# Altium PCB power_sup.PcbDoc
Units mm, origin at the board's own origin, x right, y up, seen from the top; angles counter-clockwise.
Board outline 64.01 x 77.72 mm, 2 copper layers (Top Layer, Bottom Layer); 26 components, 162 nets, 69 pads, 0 vias.
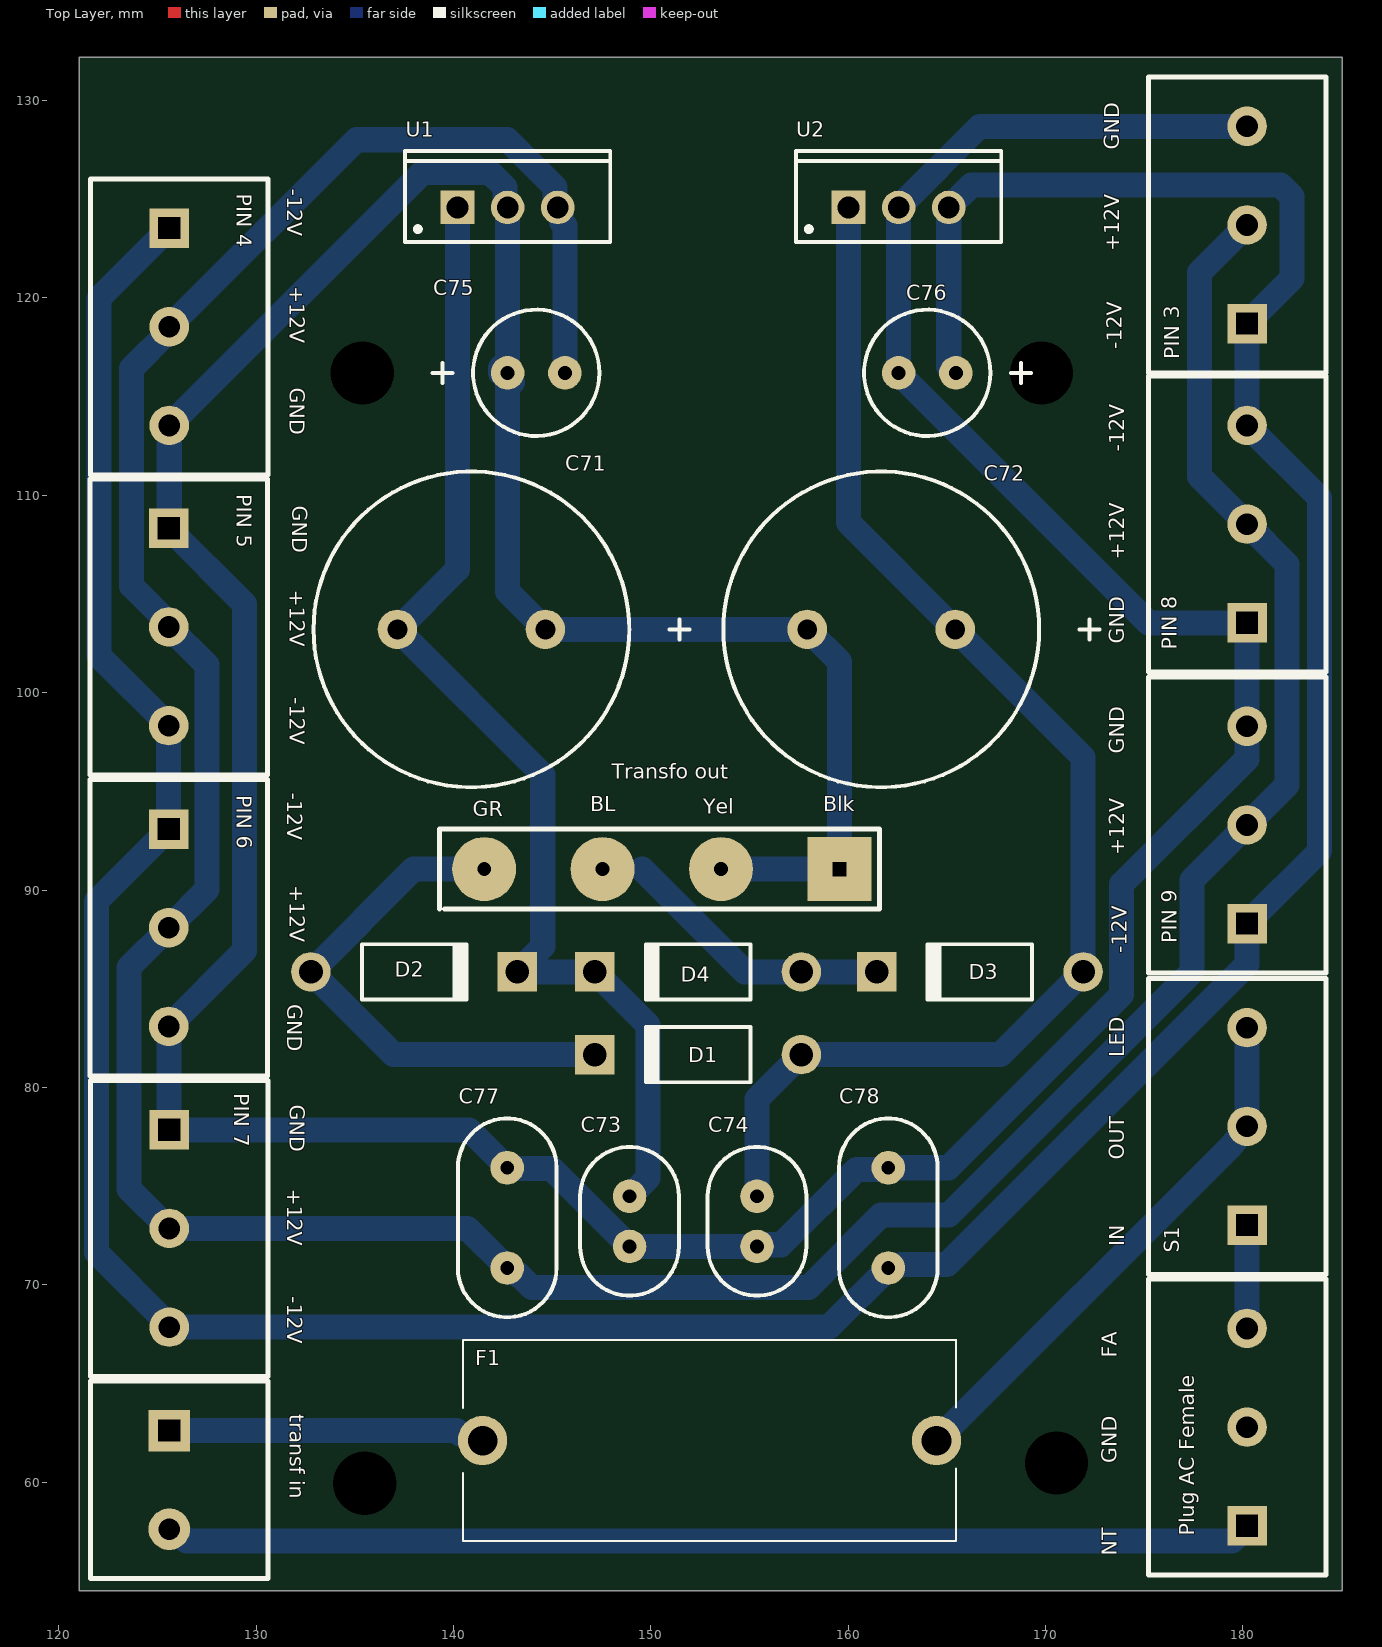
[diagram p0: Top Layer view]
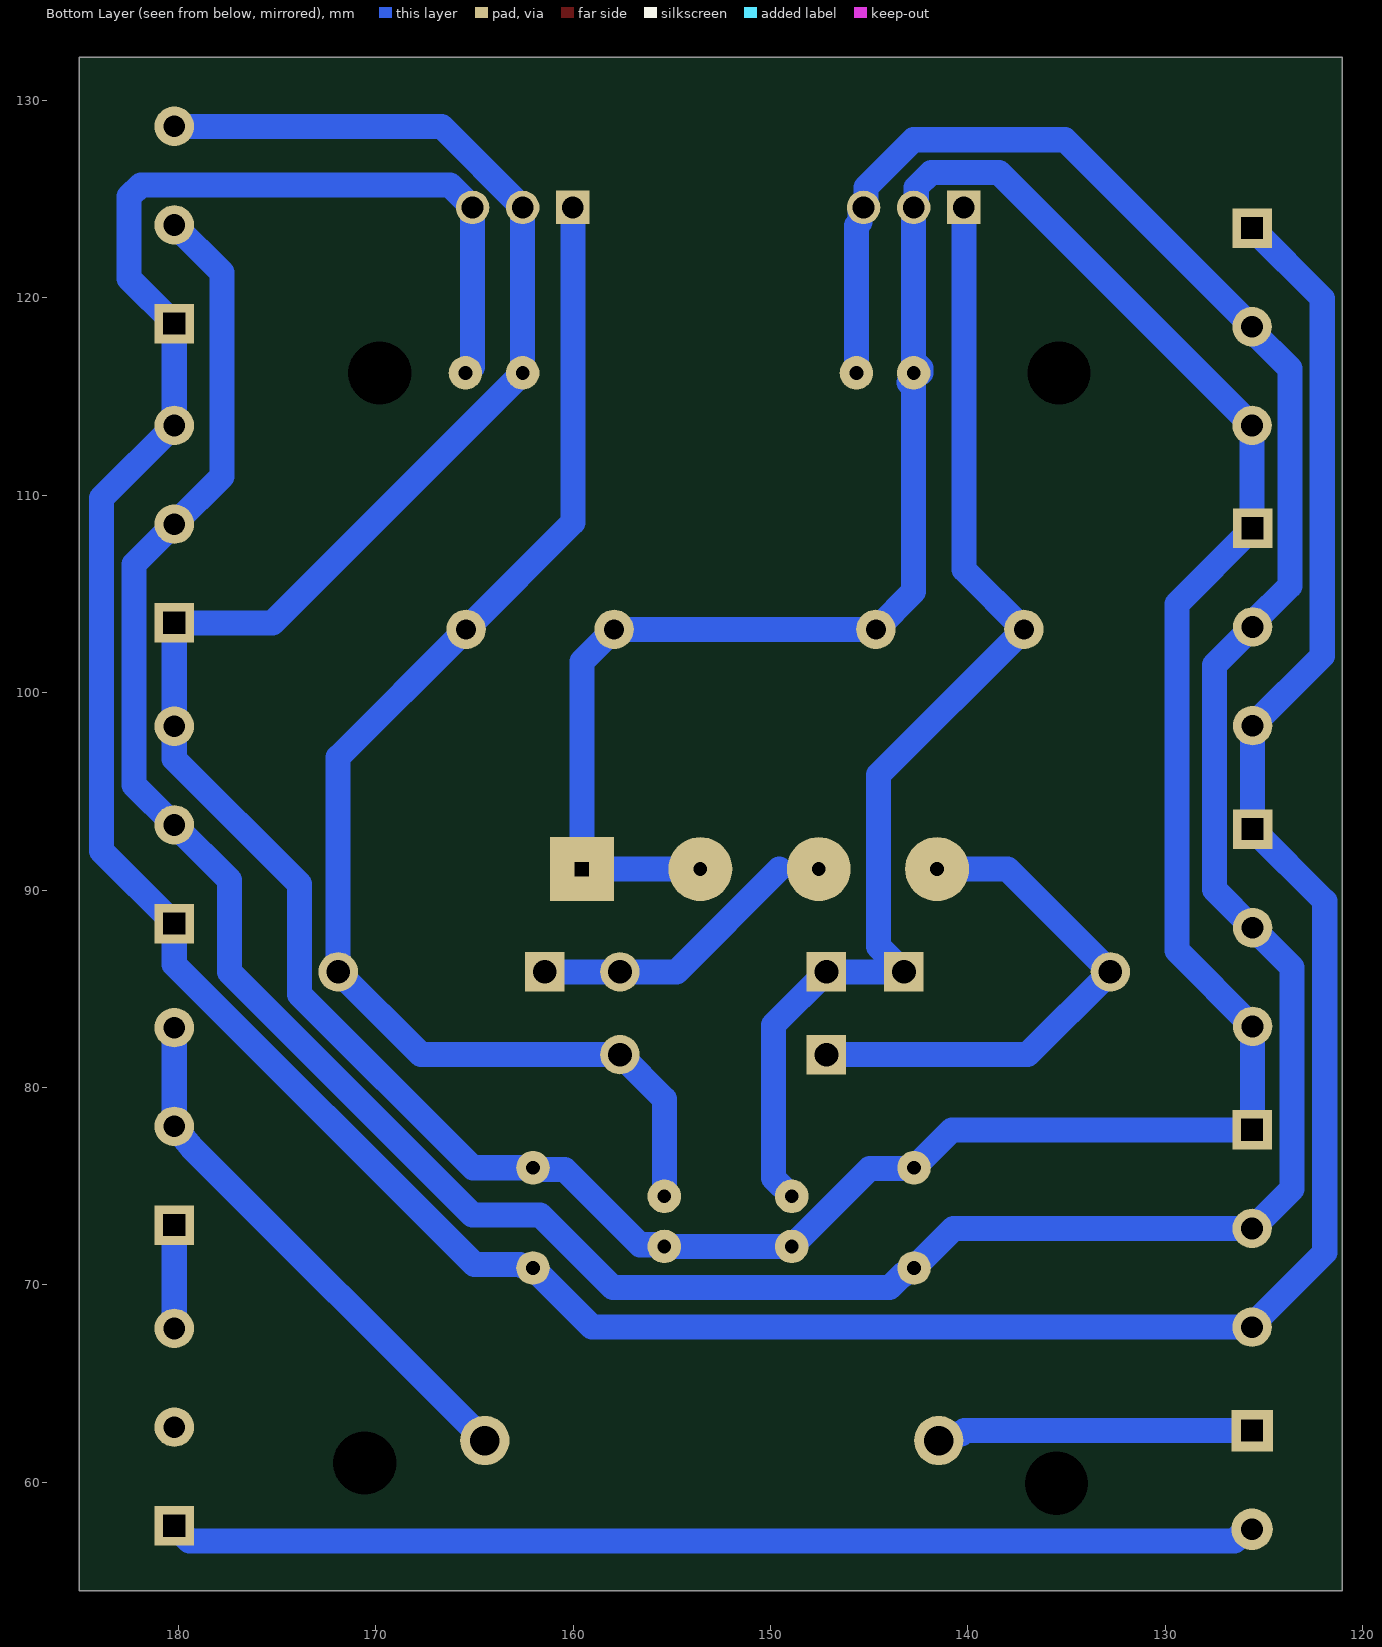
[diagram p1: Bottom Layer view, seen from below]

## Layer stack, top to bottom
Top Solder: solder mask 0.0102, Solder Resist, Dk 3.5
Top Layer: signal copper 0.0356
Dielectric 1: dielectric 0.32, FR-4, Dk 4.8
Bottom Layer: signal copper 0.0356
Bottom Solder: solder mask 0.0102, Solder Resist, Dk 3.5

## Board outline
121.031,132.207 121.031,54.483 185.039,54.483 185.039,132.207

## Design rules (kind name [scope] priority, off if disabled: settings)
Clearance [All] p1: gap=0.254 ignorepadtopadclearanceinfootprint=FALSE except(0: Arc-Hole Track-Hole SMDPad-Hole THPad-Hole Via-Hole Fill-Hole Poly-Hole Region-Hole Text-Hole)
HoleSize [All] p1: absolutevalues=TRUE maxlimit=5.08 minlimit=0.025 maxpercent=80.000 minpercent=20.000
PolygonConnect [All] p1: connectstyle=Relief reliefconductorwidth=0.254 reliefentries=4 polygonreliefangle="90 Angle" airgapwidth=0.254
RoutingLayers [All] p1: top layer_v5=FALSE bottom layer_v5=TRUE
RoutingVias [All] p1: holewidth=0.711 width=1.27 viastyle="Through Hole" minholewidth=0.711 minwidth=1.27 maxholewidth=0.711 maxwidth=1.27
SolderMaskExpansion [All] p1: expansion=0.102 istentingtop=FALSE
Width [All] p1: maxlimit=1.27 minlimit=0.254 preferedwidth=0.762 minimp=50.000000 maximp=50.000000 favimp=50.000000
28 further rules are at their usual default settings.

## Classes and differential pairs
component class power_SUP: C71 C72 C73 C75 C76 C77 C78 D1 D2 D3 D4 F1 S1

## Components (designator, comment, footprint, x,y, rotation, side; value= is the part's Value field where it differs from the comment)
C71 "Cap Pol2" "CAPACITOR 2200UF" 137.162,103.204 r0 top value=2200uF
C72 "Cap Pol2" "CAPACITOR 2200UF" 157.93,103.204 r0 top value=2200uF
C73 "Cap" 220PpF 148.925,71.942 r90 top value=220pF
C74 "Cap" 220PpF 155.384,74.482 r270 top value=220pF
C75 "Cap Pol2" "CAPACITOR 100UF" 145.648,116.205 r180 top value=100uF
C76 "Cap Pol2" "CAPACITOR 100UF" 162.56,116.205 r0 top value=100uF
C77 "Cap" "CAPACITOR 100PF" 142.726,75.928 r270 top value=100pF
C78 "Cap" "CAPACITOR 100PF" 162.037,70.848 r90 top value=100pF
D1 "Diode 1N4007" DO-41 152.4,81.66 r180 top
D2 "Diode 1N4007" DO-41 138.01,85.852 r0 top
D3 "Diode 1N4007" DO-41 166.676,85.852 r180 top
D4 "Diode 1N4007" DO-41 152.4,85.852 r180 top
F1 "Fuse_case" FLUSE_HOLDER 164.478,62.103 r180 top
"PIN 3" "Header 3" HEADER_3 180.213,118.698 r90 top
"PIN 4" "Header 3" HEADER_3 125.603,123.538 r270 top
"PIN 5" "Header 3" HEADER_3 125.575,108.328 r270 top
"PIN 6" "Header 3" HEADER_3 125.575,93.088 r270 top
"PIN 7" "Header 3" HEADER_3 125.603,77.851 r270 top
"PIN 8" "Header 3" HEADER_3 180.213,103.538 r90 top
"PIN 9" "Header 3" HEADER_3 180.213,88.298 r90 top
S1 "switch" HEADER_3 180.213,73.025 r90 top
"transf in" "trans_in" HEADER_2 125.603,62.611 r270 top (schematic designator PIN1)
"Transfo out" "trans_out" TRANSFO 159.559,91.059 r180 top (schematic designator PIN2)
U1 "L7812ACV" VOLT_REG 142.748,124.587 r0 top
U2 "L7912ACV" VOLT_REG 162.56,124.587 r0 top
? "Plug AC Female" HEADER_3 180.213,57.785 r90 top

## Footprints (in the part's own frame and the unit in brackets; to place one, negate y for a bottom-side part, rotate by r counter-clockwise, add the part's x,y. Pads: shape width x height; smd on the part's side, far side on the other; paste and mask are expansions set on the pad)
220PpF [mm]
  round 1.7 hole 0.7: 1(0,0) 2(2.54,0)
  silkscreen extent -2.5,-2.5 5.04,2.5
"CAPACITOR 100PF" [mm]
  round 1.7 hole 0.7: 1(0,0) 2(5.08,0)
  silkscreen extent -2.5,-2.5 7.58,2.5
"CAPACITOR 100UF" [mm]
  round 1.7 hole 0.7: 1(0,0) 2(2.9,0)
  silkscreen extent -1.75,-3.2 6.71,3.2
"CAPACITOR 2200UF" [mm]
  round 2 hole 1: 1(0,0) 2(7.5,0)
  silkscreen extent -4.25,-8 14.8,8
DO-41 [mm] "Diode, Axial; Body 5.2 x 2.7 mm (LxDia. max), Lead Dia. 0.86 mm (max)"
  round 2 hole 1.2: 1(-5.23,0)
  rect 2x2 hole 1.2: 2(5.23,0)
  silkscreen extent -2.65,-1.4 2.75,1.4
FLUSE_HOLDER [mm]
  round 2.5 hole 1.5: 1(0,0) 2(23,0)
  silkscreen extent -1,-5.1 24,5.1, body extent -1.27,-4.43 24.13,4.17, height 2.1
HEADER_2 [mm]
  rect 2.1x2.1 hole 1.1 square: 1(0,0)
  round 2.1 hole 1.1: 2(5,0)
  silkscreen extent -2.5,-4 7.5,5, body extent -2.65,-4 7.5,4, height 10
HEADER_3 [mm]
  rect 2x2 hole 1.1 square: 1(0,0)
  round 2 hole 1.1: 2(5,0) 3(10,0)
  silkscreen extent -2.5,-4 12.5,5, body extent -2.65,-4 12.5,4, height 10
TRANSFO [mm]
  rect 3.24x3.24 hole 0.7 square: 1(0,0)
  round 3.24 hole 0.7: 2(6,0) 3(12,0) 4(18,0)
  silkscreen extent -2.03,-2.03 20.25,2.03
VOLT_REG [mm] "TO, Thru-Hole, Vertical, Heatsink Mounted; 3 In-Line Leads; Pitch 2.54 mm"
  rect 1.7x1.7 hole 1.1: 1(-2.54,0)
  round 1.7 hole 1.1: 2(0,0) 3(2.54,0)
  silkscreen extent -5.2,-1.75 5.2,2.85, body extent -5.25,-1.8 5.25,2.9, height 19.7

## Part data
C71 C72: "electrolytic", LatestRevisionDate=17-Jul-2002, LatestRevisionNote="Re-released for DXP Platform.", PackageDescription="Polarized Capacitor; 2 Leads", PackageReference=POLAR0.8, Published=8-Jun-2000, Publisher="Altium Limited"
C73 C74 C77 C78: library part Cap_3, "Capacitor", LatestRevisionDate=17-Jul-2002, LatestRevisionNote="Re-released for DXP Platform.", PackageDescription="Radial Cap, Thru-Hole; 2 Leads; 0.3 in Pin Spacing", PackageReference=RAD-0.3, Published=8-Jun-2000, Publisher="Altium Limited"
C75 C76: library part "Cap Pol2_2", "Polarized Capacitor (Axial)", LatestRevisionDate=17-Jul-2002, LatestRevisionNote="Re-released for DXP Platform.", PackageDescription="Polarized Capacitor; 2 Leads", PackageReference=POLAR0.8, Published=8-Jun-2000, Publisher="Altium Limited"
D1 D2 D3 D4: "1 Amp General Purpose Rectifier", Code_JEDEC=DO-204-AL, ComponentLink1Description="Manufacturer Link", ComponentLink1URL=http://www.fairchildsemi.com/, ComponentLink2Description=Datasheet, ComponentLink2URL=http://www.fairchildsemi.com/ds/1N%2F1N4001.pdf, DatasheetVersion=1998, LatestRevisionDate=17-Jul-2002, LatestRevisionNote="Re-released for DXP Platform.", PackageDescription="Diode, Axial; Body 5.2 x 2.7 mm (LxDia. max), Lead Dia. 0.86 mm (max)", PackageReference=DO-41, PackageVersion=Aug-1999, Published=8-Jun-2000, Publisher="Altium Limited"
"PIN 3" "PIN 4" "PIN 5" "PIN 6" "PIN 7" "PIN 8" "PIN 9": "Header, 3-Pin", LatestRevisionDate=17-Jul-2002, LatestRevisionNote="Re-released for DXP Platform.", Publisher="Altium Limited"
"transf in": library part MHDR1X2, "Header, 2-Pin", LatestRevisionDate=17-Jul-2002, LatestRevisionNote="Re-released for DXP Platform.", Publisher="Altium Limited"
"Transfo out": library part MHDR1X4, "Header, 4-Pin", LatestRevisionDate=17-Jul-2002, LatestRevisionNote="Re-released for DXP Platform.", Publisher="Altium Limited"
U1: library part 7812, "Positive Voltage Regulator, 12V, 3-Pin TO-220", ComponentLink1Description="Manufacturer URL", ComponentLink1URL=http://www.st.com, ComponentLink2Description=Datasheet, ComponentLink2URL=http://www.st.com/internet/com/TECHNICAL_RESOURCES/TECHNICAL_LITERATURE/DATASHEET/CD00000444.pdf, ComponentLink3Description="Package Specification", ComponentLink3URL=http://www.st.com/internet/com/TECHNICAL_RESOURCES/TECHNICAL_LITERATURE/PACKAGE_INFORMATION/CD00004649.pdf, DatasheetVersion=16/11/2011, PackageDescription="TO, Thru-Hole, Vertical, Heatsink Mounted; 3 In-Line Leads; Pitch 2.54 mm", PackageReference=TO220, PackageVersion=ver3.0
U2: library part 7912, "2% Negative Voltage Regulator, -12V, 3-Pin TO-220", ComponentLink1Description="Manufacturer URL", ComponentLink1URL=http://www.st.com, ComponentLink2Description=Datasheet, ComponentLink2URL=http://www.st.com/internet/com/TECHNICAL_RESOURCES/TECHNICAL_LITERATURE/DATASHEET/CD00000451.pdf, ComponentLink3Description="Package Specification", ComponentLink3URL=http://www.st.com/internet/com/TECHNICAL_RESOURCES/TECHNICAL_LITERATURE/PACKAGE_INFORMATION/CD00004649.pdf, DatasheetVersion=1/11/2010, PackageDescription="TO, Thru-Hole, Vertical, Heatsink Mounted; 3 In-Line Leads; Pitch 2.54 mm", PackageReference=TO220, PackageVersion=ver3.0
?: "IEC Mains Power Outlet, EN60 320-2-2 F Class I, PC Flange Rear Mount, Chassis Socket", MaximumRating="10A, 250V a.c. (UL & CSA 15A, 250V a.c.)", PackageDocument="ver.80, 15-Sep-2003", ComponentLink1Description="Manufacturer Link", ComponentLink1URL=http://www.bulgin.co.uk/, DatasheetDocument="ver.80, 15-Sep-2003", DrillSize="Corresponds to nominal value.", LatestRevisionDate=15-Jul-2004, LatestRevisionNote="Component Replaced & renamed from \"Phonejack\".", MountingFixtures="Not drawn on schematic symbol.", PackageReference=PX0675/PC, PCB_Layout="Complies with manufacturer's recommendation.", Published=15-Jul-2004, Publisher="Altium Limited", Terminations="P.C. Spills"

## Free pads (board coordinates)
  round 1.524 hole 3.2 unplated: 2(135.382,116.205) 3(169.799,116.205) 5(135.509,59.944) 5(170.561,60.96)

## Nets (pads, with @x,y where several pads share a name; then routed paths per layer and width w, separated by ;. In a path a pad name is that pad's centre, name@x,y a point inside that pad or via, vN(x,y) a via of type N, cw(c..) or ccw(c..) an arc to the next point about the centre after c; other vN are vias at no path point)
GND: "PIN 3.3" "PIN 4.3" "PIN 5.1" "PIN 6.3" "PIN 7.1" "PIN 8.1" "PIN 9.3" "Transfo out.1" "Transfo out.2" C71.2 C72.1 C73.1 C74.2 C75.2 C76.1 C77.1 C78.2 U1.2 U2.2 | length 244.3
  Bottom Layer w1.27: C75.2@142.388,116.205 142.388,116.459 142.748,116.819 U1.2 142.617,124.718 142.617,125.607 141.859,126.365 138.43,126.365 125.603,113.538 125.603,108.357 125.575,108.328 129.413,104.49 129.413,86.927 125.575,83.088 125.589,83.074 125.589,77.865 125.603,77.851 140.803,77.851 C77.1 142.76,75.894 144.973,75.894 C73.1 C74.2 155.466,72.024 156.606,72.024 160.427,75.845 161.955,75.845 C78.2 165.082,75.928 173.863,84.709 173.863,90.297 180.213,96.647 180.213,98.298 180.213,103.538 175.227,103.538 C76.1 U2.2@162.56,124.529 ; C75.2@142.494,116.205 C75.2@142.748,115.951 ; C75.2@142.748,115.484 142.748,105.118 C71.2 C72.1 159.559,101.575 159.559,91.059 154.559,91.059 ; C75.2 C75.2@142.748,115.951 ; C75.2@142.982,115.718 C75.2@142.748,115.951 ; U2.2 166.671,128.698 180.213,128.698
GND_Chasie: ?.2
Net_1: "transf in.2" ?.1 | length 55.2
  Bottom Layer w1.27: 125.603,57.611 125.896,57.611 126.484,57.023 179.451,57.023 ?.1
Net_3: ?.3 S1.1 | length 5.2
  Bottom Layer w1.27: ?.3 S1.1
NetC1_1: 
NetC1_2: 
NetC2_1: 
NetC2_2: 
NetC3_1: 
NetC4_1: 
NetC4_2: 
NetC5_1: 
NetC21_2: 
NetC22_1: 
NetC22_2: 
NetC23_1: 
NetC23_2: 
NetC24_1: 
NetC24_2: 
NetC25_1: 
NetC26_1: 
NetC27_1: 
NetC27_2: 
NetC28_1: 
NetC31_1: 
NetC31_2: 
NetC34_1: 
NetC34_2: 
NetC35_1: 
NetC35_2: 
NetC36_2: 
NetC40_1: 
NetC40_2: 
NetC43_1: 
NetC43_2: 
NetC44_1: 
NetC44_2: 
NetC45_2: 
NetC51_1: 
NetC51_2: 
NetC52_2: 
NetC53_1: 
NetC53_2: 
NetC54_1: 
NetC54_2: 
NetC55_1: 
NetC55_2: 
NetC56_1: 
NetC57_1: 
NetC58_1: 
NetC58_2: 
NetC59_1: 
NetC60_1: 
NetC60_2: 
NetC61_2: 
NetC62_1: 
NetC62_2: 
NetC63_1: 
NetC63_2: 
NetC64_1: 
NetC64_2: 
NetC65_1: 
NetC66_1: 
NetC67_1: 
NetC67_2: 
NetC68_1: 
NetC71_1: C71.1 C73.2 D2.2 D4.2 U1.1 | length 60.4
  Bottom Layer w1.27: U1.1 140.208,106.251 C71.1 144.526,95.84 144.526,87.138 D2.2 D4.2 149.86,83.162 149.86,75.417 C73.2
NetC72_2: C72.2 C74.1 D1.1 D3.1 U2.1 | length 67.8
  Bottom Layer w1.27: C74.1 155.384,79.414 D1.1 167.714,81.66 D3.1 171.906,96.728 C72.2 160.02,108.614 U2.1
NetC81_1: 
NetC81_2: 
NetC83_1: 
NetC83_2: 
NetD1_2: "Transfo out.4" D1.2 D2.1 | length 27.1
  Bottom Layer w1.27: 141.559,91.059 137.987,91.059 D2.1 136.972,81.66 D1.2
NetD3_2: "Transfo out.3" D3.2 D4.1 | length 14
  Bottom Layer w1.27: 149.559,91.059 154.766,85.852 D4.1 D3.2
NetD5_1: 
NetD7_2: 
NetD8_2: 
NetD9_2: 
NetD10_2: 
NetD11_1: 
NetD12_2: 
NetD14_2: 
NetD15_2: 
NetD16_2: 
NetD17_2: 
NetF1_1: F1.1 S1.2 S1.3 | length 27.4
  Bottom Layer w1.27: F1.1 179.337,76.962 180.213,78.025 S1.3
NetF1_2: "transf in.1" F1.2 | length 16.1
  Bottom Layer w1.27: 125.603,62.611 140.163,62.611 140.338,62.436 141.145,62.436 F1.2
NetIC1_1: 
NetIC1_2: 
NetIC1_6: 
NetIC1_7: 
NetIC2_2: 
NetIC2_3: 
NetIC2_6: 
NetIC3_6: 
NetIC4_1: 
NetIC4_2: 
NetIC4_6: 
NetIC4_7: 
NetIC5_5: 
NetIC6_6: 
NetIC7_6: 
NetIC8_1: 
NetIC8_2: 
NetIC8_6: 
NetIC8_7: 
NetIC9_5: 
NetIC11_1: 
NetIC11_2: 
NetIC11_4: 
NetIC11_5: 
NetIC11_7: 
NetIC11_9: 
NetIC11_11: 
NetIC11_13: 
NetIC11_14: 
NetIC12_1: 
NetIC12_2: 
NetIC12_4: 
NetIC12_5: 
NetIC12_7: 
NetIC12_9: 
NetIC12_11: 
NetIC12_13: 
NetIC12_14: 
NetP1_2: 
NetP2_1_2: 
NetP2_1_5: 
NetP2_3_1: 
NetP2_3_3: 
NetP2_3_4: 
NetP2_3_6: 
NetP2_4_2: 
NetP2_4_5: 
NetP4_1: 
NetP4_2: 
NetP5_2: 
NetP6_1: 
NetP6_3: 
NetP8_1: 
NetP8_3: 
NetP13_1: 
"NetPIN 14_1": 
"NetPIN 14_2": 
"NetPIN 14_3": 
"NetPIN 14_4": 
"NetPIN 14_5": 
"NetPIN 14_6": 
"NetPIN 15_1": 
"NetPIN 15_2": 
"NetPIN 15_3": 
"NetPIN 15_4": 
"NetPIN 15_5": 
"NetPIN 15_6": 
"NetPIN 17_1": 
"NetPIN 17_2": 
"NetPIN 19_1": 
"NetPIN 19_2": 
NetR58_2: 
NetR105_2: 
VCC: "PIN 3.2" "PIN 4.2" "PIN 5.2" "PIN 6.2" "PIN 7.2" "PIN 8.2" "PIN 9.2" C75.1 C77.2 U1.3 | length 187
  Bottom Layer w1.27: 125.575,72.848 123.571,74.852 123.571,86.085 125.575,88.088 127.508,90.022 127.508,101.395 125.575,103.328 125.575,103.526 123.686,105.415 123.686,116.423 125.603,118.34 125.603,118.538 135.081,128.016 142.748,128.016 145.157,125.607 145.157,124.718 145.467,124.408 145.467,123.852 145.648,123.672 C75.1 ; 125.603,72.851 140.723,72.851 C77.2 142.912,70.848 143.254,70.506 143.322,70.506 143.978,69.85 157.988,69.85 161.671,73.533 165.1,73.533 177.419,85.852 177.419,90.504 180.213,93.298 182.245,95.33 182.245,106.506 180.213,108.538 177.8,110.951 177.8,121.285 180.213,123.698
VEE: "PIN 3.1" "PIN 4.1" "PIN 5.3" "PIN 6.1" "PIN 7.3" "PIN 8.3" "PIN 9.1" C76.2 C78.1 U2.3 | length 193
  Bottom Layer w1.27: 125.603,67.851 159.04,67.851 162.168,70.978 162.651,70.978 162.7,71.027 165.007,71.027 180.213,86.233 180.213,88.298 183.896,91.981 183.896,109.855 180.213,113.538 180.213,118.698 182.499,120.984 182.499,125.135 181.904,125.73 166.243,125.73 U2.3 C76.2@165.1,116.494 ; 125.603,123.538 122.047,119.982 122.047,101.856 125.575,98.328 125.575,93.088 121.92,89.434 121.92,71.628 125.65,67.898

## Silkscreen, mask and mechanical layers (free items; w line width, h text height)
Top Overlay:
  text "GND" at 173.736,127.508 h0.76 r90
  text "-12V" at 131.572,125.539 h0.76 r270
  text "+12V" at 173.736,122.365 h0.76 r90
  text "+12V" at 131.699,120.586 h0.76 r270
  text "-12V" at 173.863,117.412 h0.76 r90
  text "GND" at 131.699,115.443 h0.76 r270
  text "-12V" at 173.99,112.205 h0.76 r90
  text "GND" at 131.826,109.474 h0.76 r270
  text "+12V" at 173.99,106.744 h0.76 r90
  text "+12V" at 131.699,105.219 h0.76 r270
  text "GND" at 173.99,102.489 h0.76 r90
  text "-12V" at 131.699,99.758 h0.76 r270
  text "GND" at 173.99,96.901 h0.76 r90
  text "-12V" at 131.572,94.932 h0.76 r270
  text "BL" at 146.939,93.98 h0.76
  text "Blk" at 158.75,93.98 h0.76
  text "Yel" at 152.654,93.853 h0.76
  text "GR" at 140.97,93.726 h0.76
  text "+12V" at 173.99,91.758 h0.76 r90
  text "+12V" at 131.699,90.233 h0.76 r270
  text "-12V" at 174.117,86.805 h0.76 r90
  text "GND" at 131.572,84.201 h0.76 r270
  text "LED" at 173.99,81.534 h0.76 r90
  text "GND" at 131.699,79.121 h0.76 r270
  text "OUT" at 173.99,76.327 h0.76 r90
  text "+12V" at 131.572,74.866 h0.76 r270
  text "IN" at 173.99,71.946 h0.76 r90
  text "-12V" at 131.572,69.405 h0.76 r270
  text "FA" at 173.609,66.294 h0.76 r90
  text "GND" at 173.609,60.96 h0.76 r90
  text "NT" at 173.609,56.261 h0.76 r90